# EAGLE board RPM3 (EAGLE 7.6.0)
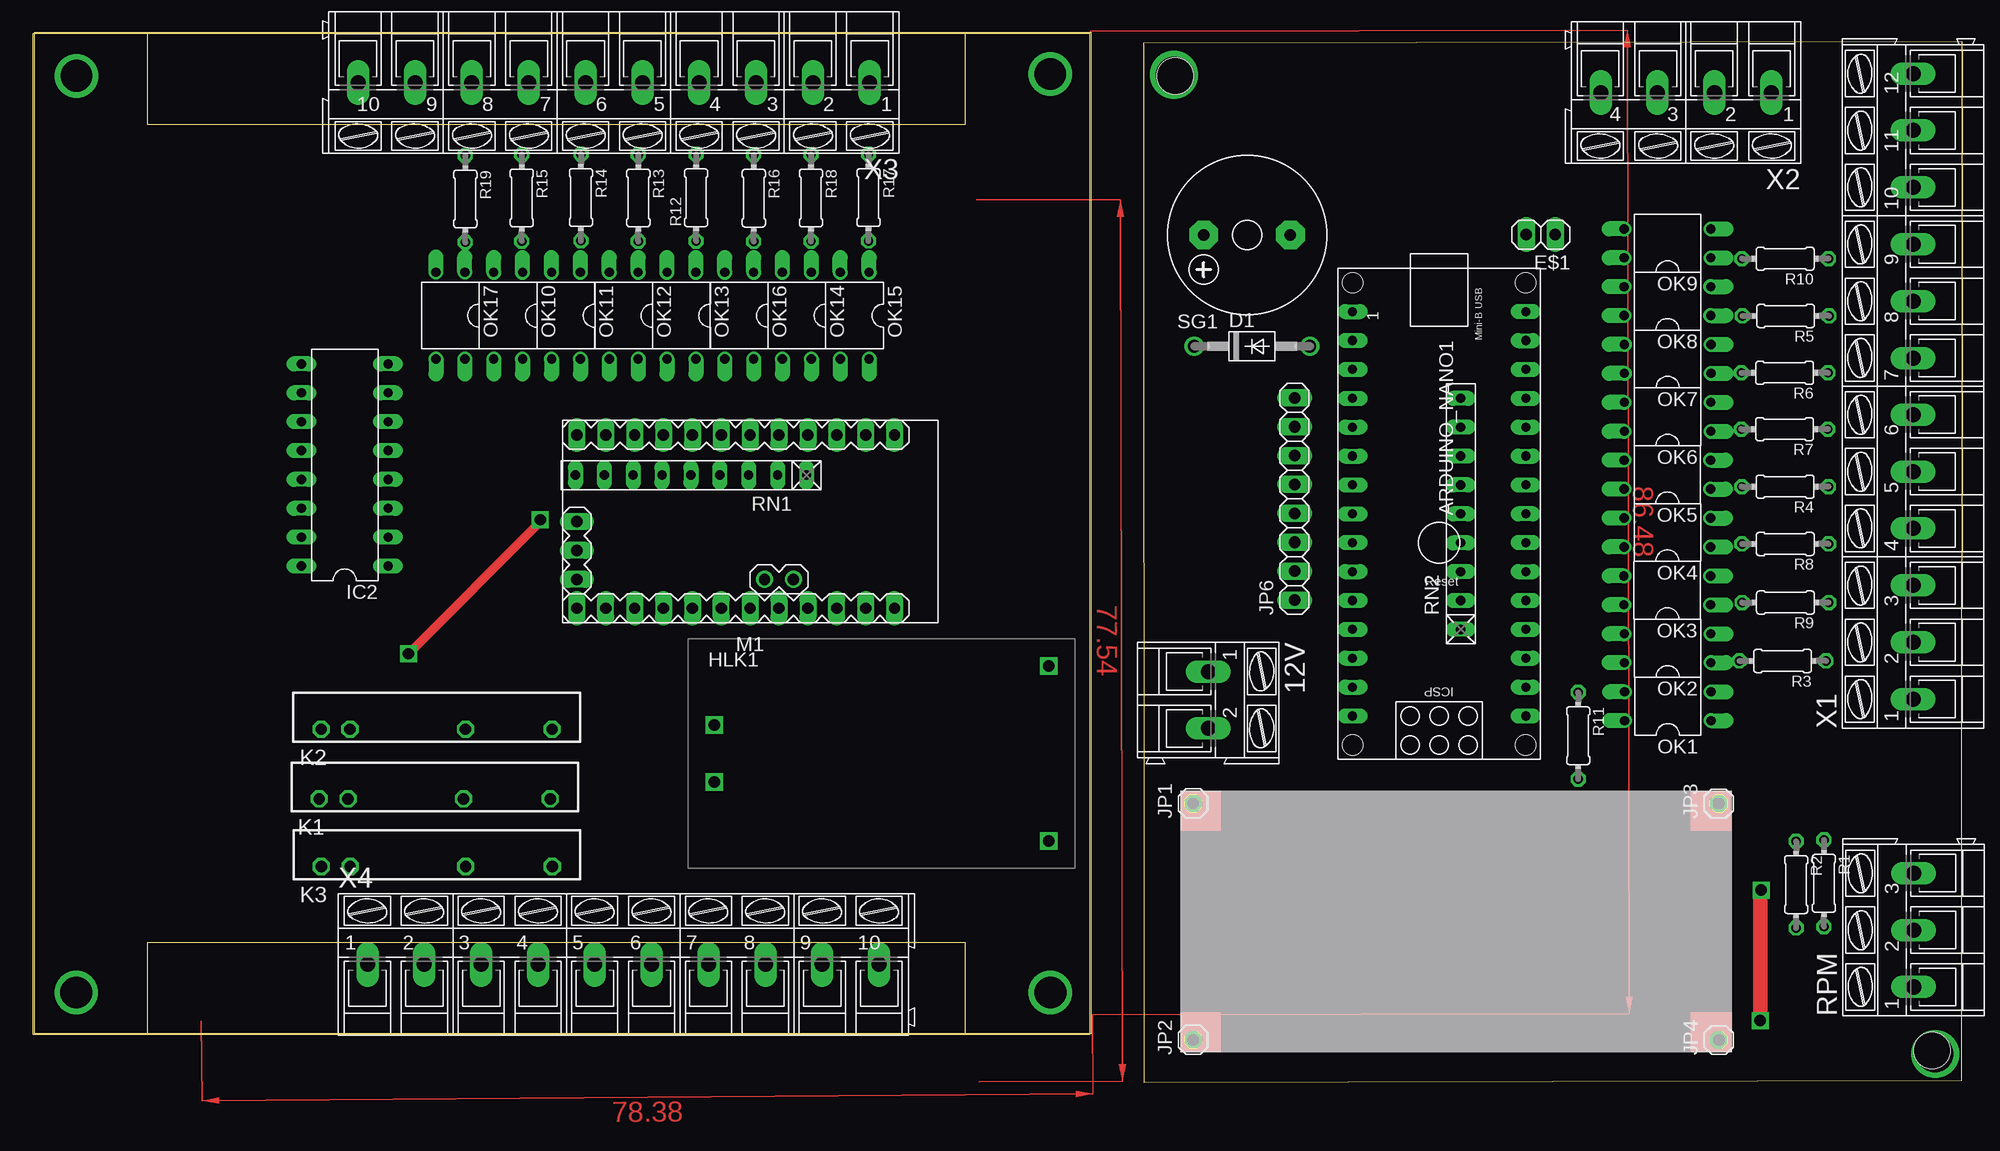
[diagram p0: board, top side]
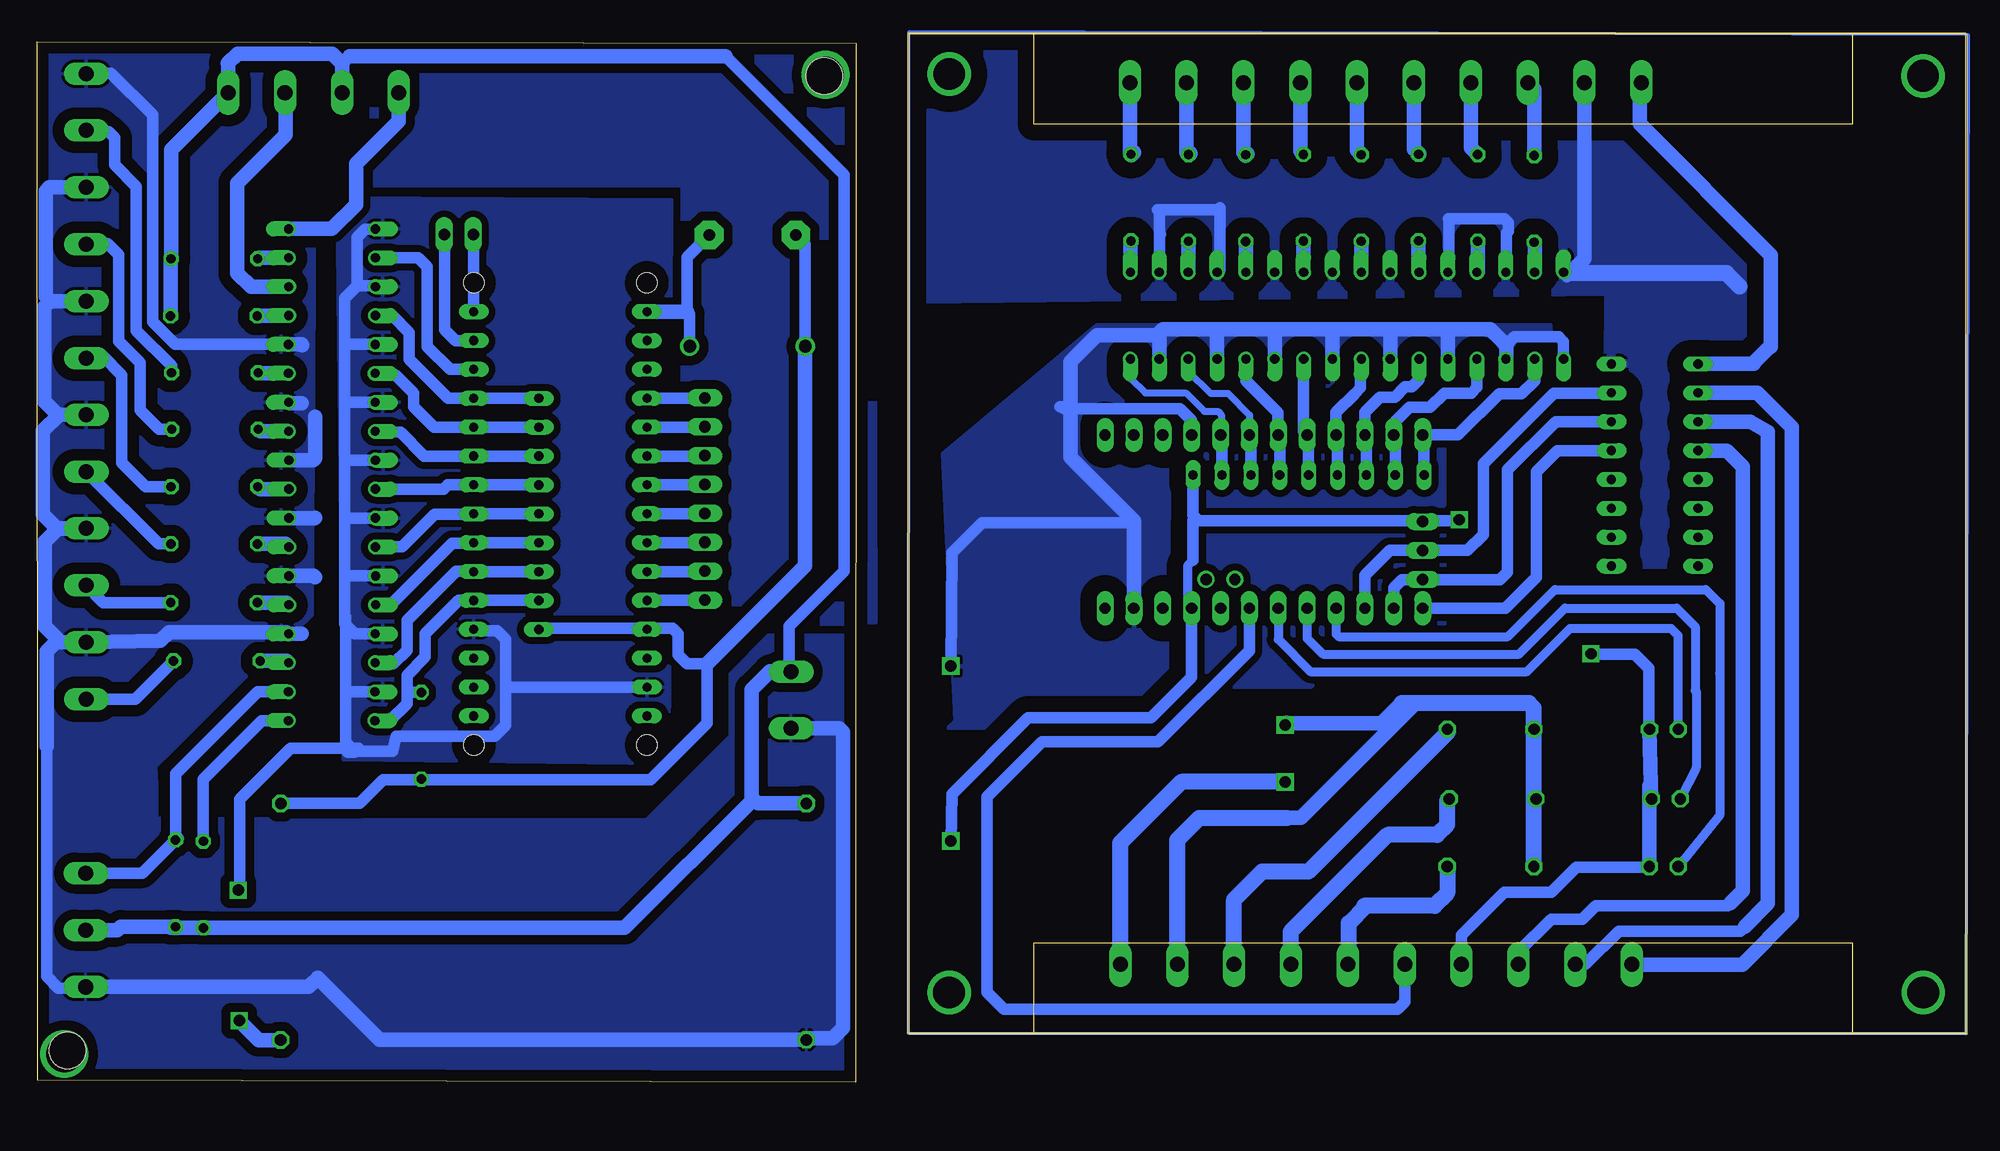
[diagram p1: board, bottom side, seen from below]

Size 169.71 x 92.29 mm. Coordinates in mm from the lower left corner, seen from the top.
Outline: 169.69,0.17 169.71,91.51 97.69,91.34 97.74,0 169.69,0.17
Outline: 93,92.21 0,92.21 0,4.21 93,4.21 93,92.21
Outline: 0.14,4.29 93.14,4.29 93.14,92.29 0.14,92.29 0.14,4.29
Copper layers (1*16): Top 0.035mm / dielectric 1.5mm / Bottom 0.035mm
Design rules "default": minimum track width 10mil, minimum drill 24mil, track to track 8mil, track to pad 8mil, pad to pad 8mil, via to via 8mil, smd to smd 8mil, copper to edge 40mil, drill to drill 8mil, minimum pad ring 10mil, minimum via ring 8mil, stop-mask expansion 4mil, vias tented up to drill 0mil, thermal gap 10mil
Holes 3.2 mm at 100.49,88.49 167.05,2.79

## Footprints (pad centres in the part's own frame; a part is rotated, then mirrored left to right if it is on the bottom)
AK300/2 = drill 1.321 long: 1 -2.515,0; 2 2.489,0
ARDUINO_NANO = drill 0.8 long: 1 -20.32,-7.62; 2 -17.78,-7.62; 3 -15.24,-7.62; 4 -12.7,-7.62; 5 -10.16,-7.62; 6 -7.62,-7.62; 7 -5.08,-7.62; 8 -2.54,-7.62; 9 0,-7.62; 10 2.54,-7.62; 11 5.08,-7.62; 12 7.62,-7.62; 13 10.16,-7.62; 14 12.7,-7.62; 15 15.24,-7.62; 16 15.24,7.62; 17 12.7,7.62; 18 10.16,7.62; 19 7.62,7.62; 20 5.08,7.62; 21 2.54,7.62; 22 0,7.62; 23 -2.54,7.62; 24 -5.08,7.62; 25 -7.62,7.62; 26 -10.16,7.62; 27 -12.7,7.62; 28 -15.24,7.62; 29 -17.78,7.62; 30 -20.32,7.62 | hole 1.778: -22.86,-7.62; -22.86,7.62; 17.78,7.62; 17.78,-7.62
DO41-10 = drill 1.118: A 5.08,0; C -5.08,0
1X02 = drill 1.016 long: 1 -1.27,0; 2 1.27,0
HLK-PM01 = drill 1.016 square: P$1 -14.7,2.5; P$2 -14.7,-2.5; P$3 14.7,7.7; P$4 14.7,-7.7
DIL16 = drill 0.813 long: 1 -8.89,-3.81; 2 -6.35,-3.81; 3 -3.81,-3.81; 4 -1.27,-3.81; 5 1.27,-3.81; 6 3.81,-3.81; 7 6.35,-3.81; 8 8.89,-3.81; 9 8.89,3.81; 10 6.35,3.81; 11 3.81,3.81; 12 1.27,3.81; 13 -1.27,3.81; 14 -3.81,3.81; 15 -6.35,3.81; 16 -8.89,3.81
1X01 = drill 1.016 octagon: 1 0,0
1X08 = drill 1.016 long: 1 -8.89,0; 2 -6.35,0; 3 -3.81,0; 4 -1.27,0; 5 1.27,0; 6 3.81,0; 7 6.35,0; 8 8.89,0
AQG = drill 1 octagon: + -7.62,0; - -10.16,0; O1 2.54,0; O2 10.16,0
ARDUINO-PRO-MINI = drill 1: J2.1 -1.27,5.08; J2.2 -3.81,5.08 | drill 1 long: J3.1 15.24,0; J3.2 15.24,2.54; J3.3 15.24,5.08; J6.1 -12.7,7.62; J6.2 -10.16,7.62; J6.3 -7.62,7.62; J6.4 -5.08,7.62; J6.5 -2.54,7.62; J6.6 0,7.62; J6.7 2.54,7.62; J6.8 5.08,7.62; J6.9 7.62,7.62; J6.10 10.16,7.62; J6.11 12.7,7.62; J6.12 15.24,7.62; J7.1 15.24,-7.62; J7.2 12.7,-7.62; J7.3 10.16,-7.62; J7.4 7.62,-7.62; J7.5 5.08,-7.62; J7.6 2.54,-7.62; J7.7 0,-7.62; J7.8 -2.54,-7.62; J7.9 -5.08,-7.62; J7.10 -7.62,-7.62; J7.11 -10.16,-7.62; J7.12 -12.7,-7.62
DIL04 = drill 0.813 offset: 1 -1.27,-3.81; 2 1.27,-3.81; 3 1.27,3.81; 4 -1.27,3.81
0204/7 = drill 0.813 octagon: 1 -3.81,0; 2 3.81,0
RN-9 = drill 0.813 long: 1 -10.16,0; 2 -7.62,0; 3 -5.08,0; 4 -2.54,0; 5 0,0; 6 2.54,0; 7 5.08,0; 8 7.62,0; 9 10.16,0
AK300/3 = drill 1.321 long: 1 -5.004,0; 2 0,0; 3 5.004,0
F/CM12P = drill 1.016 pad 2.54 octagon: + 3.81,0; - -3.81,0
AK300/12 = drill 1.321 long: 1 -27.508,0; 2 -22.504,0; 3 -17.501,0; 4 -12.497,0; 5 -7.493,0; 6 -2.489,0; 7 2.489,0; 8 7.493,0; 9 12.497,0; 10 17.501,0; 11 22.504,0; 12 27.508,0
AK300/4 = drill 1.321 long: 1 -7.493,0; 2 -2.515,0; 3 2.515,0; 4 7.493,0
AK300/10 = drill 1.321 long: 1 -22.504,0; 2 -17.501,0; 3 -12.497,0; 4 -7.493,0; 5 -2.515,0; 6 2.489,0; 7 7.493,0; 8 12.497,0; 9 17.501,0; 10 22.504,0

## Placement (x,y rotation side)
12V  [AK300/2]  103.39,33.6 270 top
ARDUINO_NANO1  [ARDUINO_NANO]  123.7,47.44 270 top
D1  1N4004  [DO41-10]  107.24,64.72 0 top
E$1  [1X02]  132.64,74.53 180 top
HLK1  HLK-PM013W  [HLK-PM01]  74.65,28.9 0 top
IC2  ULN2003AN  [DIL16]  27.43,54.28 90 top
JP1  [1X01]  102.06,24.52 90 top
JP2  [1X01]  102.06,3.73 90 top
JP3  [1X01]  148.29,24.51 90 top
JP4  [1X01]  148.3,3.71 90 top
JP6  [1X08]  110.98,51.29 90 top
K1  AQG12105  [AQG]  35.35,24.91 0 top
K2  AQG12105  [AQG]  35.52,31.03 0 top
K3  AQG12105  [AQG]  35.53,18.96 0 top
M1  ARDUINO-PRO-MINI-5.0V  [ARDUINO-PRO-MINI]  63.09,49.3 180 top
OK1  PC817  [DIL04]  143.82,33.06 90 top
OK2  PC817  [DIL04]  143.8,38.16 90 top
OK3  PC817  [DIL04]  143.77,43.25 90 top
OK4  PC817  [DIL04]  143.78,48.34 90 top
OK5  PC817  [DIL04]  143.78,53.43 90 top
OK6  PC817  [DIL04]  143.79,58.51 90 top
OK7  PC817  [DIL04]  143.8,63.6 90 top
OK8  PC817  [DIL04]  143.79,68.68 90 top
OK9  PC817  [DIL04]  143.79,73.77 90 top
OK10  PC817  [DIL04]  41.81,67.41 180 top
OK11  PC817  [DIL04]  46.89,67.41 180 top
OK12  PC817  [DIL04]  51.98,67.41 180 top
OK13  PC817  [DIL04]  57.05,67.41 180 top
OK14  PC817  [DIL04]  67.21,67.41 180 top
OK15  PC817  [DIL04]  72.29,67.41 180 top
OK16  PC817  [DIL04]  62.13,67.41 180 top
OK17  PC817  [DIL04]  36.73,67.42 180 top
R1  [0204/7]  157.55,17.49 270 top
R2  [0204/7]  155.1,17.37 270 top
R3  [0204/7]  153.92,37.04 180 top
R4  [0204/7]  154.13,52.37 180 top
R5  [0204/7]  154.18,67.38 180 top
R6  [0204/7]  154.09,62.38 180 top
R7  [0204/7]  154.09,57.43 180 top
R8  [0204/7]  154.15,47.33 180 top
R9  [0204/7]  154.16,42.18 180 top
R10  [0204/7]  154.14,72.42 180 top
R11  [0204/7]  135.93,30.47 270 top
R12  [0204/7]  58.34,77.78 90 top
R13  [0204/7]  53.26,77.76 270 top
R14  [0204/7]  48.21,77.8 270 top
R15  [0204/7]  43.01,77.76 270 top
R16  [0204/7]  63.42,77.74 270 top
R17  [0204/7]  73.51,77.79 270 top
R18  [0204/7]  68.45,77.76 270 top
R19  [0204/7]  38.04,77.67 270 top
RN1  [RN-9]  57.89,53.39 180 top
RN2  [RN-9]  125.6,49.98 90 top
RPM  [AK300/3]  165.44,13.38 90 top
SG1  F/CM12P  [F/CM12P]  106.8,74.5 180 top
X1  [AK300/12]  165.4,61.19 90 top
X2  [AK300/4]  145.41,87.02 180 top
X3  [AK300/10]  51.11,87.9 180 top
X4  [AK300/10]  51.94,10.36 0 top

## Library data of the parts
12V RPM X1-X4 = con-ptr500; OC_FARNELL: unknown; OC_NEWARK: unknown
ARDUINO_NANO1 = ArduinoNanoV30
D1 = diode
E$1 JP1-JP4 JP6 = pinhead
HLK1 = HLK-PM01
IC2 = uln-udn
K1-K3 = relay; MF: AROMAT/ MATSUSHITA; MPN: AQG12105; OC_FARNELL: unknown; OC_NEWARK: 20J4759
M1 = diy-modules
OK1-OK17 = optocoupler; MPN: PC817X4J000F; OC_FARNELL: 9707727; OC_NEWARK: 97K7059
R1 R5 R10 R12-R19 = rcl
R2-R4 R6-R9 R11 = resistor
RN1 RN2 = resistor-net; OC_FARNELL: unknown; OC_NEWARK: unknown
SG1 = buzzer; OC_FARNELL: unknown; OC_NEWARK: unknown

## Nets
5V: HLK1.P$4 K1.+ K2.+ K3.+ M1.J6.4 RN1.1 X4.4
12V: IC2.9 X3.10
GND: ARDUINO_NANO1.14 ARDUINO_NANO1.19 JP4.1 OK1.3 OK2.3 OK3.3 OK4.3 OK5.3 OK6.3 OK7.3 OK8.3 OK9.3
GND1: HLK1.P$3 M1.J6.2 M1.J7.9 OK10.3 OK11.3 OK12.3 OK13.3 OK14.3 OK15.3 OK16.3 OK17.3
GND12V: IC2.8 OK10.2 OK11.2 OK12.2 OK13.2 OK14.2 OK15.2 OK16.2 OK17.2 X3.9
N$1: ARDUINO_NANO1.20 OK1.4 R11.1 RN2.2
N$2: OK1.1 R2.1
N$3: M1.J7.5 OK13.4 RN1.5
N$4: M1.J7.6 OK16.4 RN1.4
N$5: OK2.1 R3.2
N$6: OK3.1 R9.2
N$7: OK4.1 R8.2
N$8: OK5.1 R4.2
N$9: OK6.1 R7.2
N$10: OK7.1 R6.2
N$11: R7.1 X1.9
N$12: ARDUINO_NANO1.29 E$1.1
N$13: R4.1 X1.7
N$14: R17.1 X3.1
N$15: R3.1 X1.1
N$16: R9.1 X1.3
N$17: ARDUINO_NANO1.30 E$1.2
N$18: ARDUINO_NANO1.11 JP6.1
N$19: R18.1 X3.2
N$20: R15.1 X3.7
N$21: R8.1 X1.5
N$22: ARDUINO_NANO1.10 JP6.2
N$23: ARDUINO_NANO1.21 OK2.4 RN2.3
N$24: ARDUINO_NANO1.22 OK3.4 RN2.4
N$25: ARDUINO_NANO1.23 OK4.4 RN2.5
N$26: ARDUINO_NANO1.24 OK5.4 RN2.6
N$27: ARDUINO_NANO1.25 OK6.4 RN2.7
N$28: ARDUINO_NANO1.26 OK7.4 RN2.8
N$29: ARDUINO_NANO1.9 JP6.3
N$30: ARDUINO_NANO1.27 OK8.4 RN2.9
N$31: ARDUINO_NANO1.1 D1.A SG1.-
N$32: ARDUINO_NANO1.8 JP6.4
N$33: ARDUINO_NANO1.7 JP6.5
N$34: ARDUINO_NANO1.6 JP6.6
N$35: ARDUINO_NANO1.5 JP6.7
N$36: ARDUINO_NANO1.4 JP6.8
N$37: R13.1 X3.5
N$38: OK9.1 R10.2
N$39: OK8.1 R5.2
N$40: R6.1 X1.11
N$41: 12V.2 JP2.1 OK2.2 OK3.2 OK4.2 OK5.2 OK6.2 OK7.2 RPM.1 X1.2 X1.4 X1.6 X1.8 X1.10 X1.12
N$42: 12V.1 JP1.1 R1.2 R2.2 R5.1 R10.1 RPM.2 X2.1 X2.3
N$43: OK8.2 X2.2
N$44: R14.1 X3.6
N$45: OK9.2 X2.4
N$46: M1.J7.3 OK11.4 RN1.7
N$47: M1.J7.7 OK14.4 RN1.3
N$48: M1.J7.2 OK10.4 RN1.8
N$49: IC2.5 M1.J6.12
N$50: OK13.1 R12.1
N$51: R16.1 X3.3
N$52: IC2.7 M1.J6.10
N$53: M1.J7.8 OK15.4 RN1.2
N$54: IC2.6 M1.J6.11
N$55: M1.J7.4 OK12.4 RN1.6
N$56: OK10.1 R15.2
N$57: OK11.1 R14.2
N$58: OK12.1 R13.2
N$59: R12.2 X3.4
N$60: OK16.1 R16.2
N$61: OK14.1 R18.2
N$62: OK15.1 R17.2
N$63: IC2.10 X4.1
N$64: IC2.11 X4.2
N$65: IC2.12 X4.3
N$66: HLK1.P$2 X4.10
N$67: HLK1.P$1 K1.O1 K2.O1 K3.O1 X4.9
N$68: OK17.1 R19.2
N$69: R19.1 X3.8
N$70: K3.O2 X4.6
N$71: K1.O2 X4.7
N$72: K2.O2 X4.8
N$73: M1.J7.1 OK17.4 RN1.9
N$74: M1.J6.6 X4.5
N$75: K3.- M1.J6.9
N$76: K1.- M1.J6.8
N$77: K2.- M1.J6.7
RAW: M1.J6.1
S$1: ARDUINO_NANO1.28 OK9.4
SIGNAL: OK1.2 R1.1 RPM.3
VCC: ARDUINO_NANO1.12 D1.C JP3.1 R11.2 RN2.1 SG1.+
VIN: ARDUINO_NANO1.15

## Tracks (layer width: path | path; a pad name or v marks a point on that pad's centre or on a via)
5V  (via drill 1)
  Top 0.813: v44.63,49.45 44.63,49.27 v33.04,37.68
  Top 1.016: v44.63,49.45 44.77,49.45
  Bottom 0.61: 68.53,42.04 M1.J6.4
  Bottom 0.813: 68.05,45.88 68.53,45.4 68.53,42.04 | v33.04,37.68 32.93,37.68 32.88,37.63
  Bottom 1.016: HLK1.P$4 89.26,25.34 82.56,32.04 71.77,32.04 68.21,35.6 68.21,41.64 M1.J6.4 | RN1.1 68.05,49.86 67.82,49.63 | 67.82,49.63 67.58,49.39 44.7,49.39 v44.63,49.45 | 32.88,37.63 29.2,37.63 27.97,36.4 27.97,31.11 K2.+ | 68.05,45.88 68.05,49.4 67.82,49.63 | X4.4 44.44,12.91 40.67,16.68 36.55,16.68 34.32,18.91 27.97,18.91 K3.+
  Bottom 1.27: K3.+ 27.91,26.08 K1.+ 27.8,26.19 K2.+
12V
  Bottom 1.27: IC2.9 18.83,63.17 | 18.83,63.17 18.74,63.17 | 18.83,63.17 17.31,64.68 17.22,64.68 17.22,72.74 28.74,84.26 28.74,87.77 X3.10
GND  (via drill 1)
  Top 1.27: v151.94,5.41 151.94,16.82 v152.02,16.9
  Bottom 1.016: 128.5,34.93 128.5,31.41 129.48,30.42 138.16,30.42 138.44,29.11 141.23,29.11 | ARDUINO_NANO1.19 131.22,39.72 129.28,39.72 128.5,38.94 128.5,34.93 | ARDUINO_NANO1.14 128.31,34.74 128.5,34.93 | OK2.3 141.81,39.43 142.68,40.3 142.68,41 | 142.68,41 142.68,44.69 | 142.68,44.69 142.68,49.65 | 142.68,49.65 142.68,54.84 | 142.68,54.84 142.68,59.75 | 142.68,59.75 142.68,65.17 | 142.68,65.17 142.68,68.92 141.58,70.02 | OK8.3 140.05,70.02 141.58,70.02 | OK7.3 142.39,64.87 142.68,65.17 | OK6.3 142.65,59.78 142.68,59.75 | OK5.3 142.53,54.7 142.68,54.84 | OK4.3 142.64,49.61 142.68,49.65 | OK3.3 142.52,44.52 142.68,44.69 | 142.6,34.34 142.6,29.87 141.86,29.14 | 142.6,34.34 142.6,40.91 142.68,41 | 141.23,29.11 142.33,29.11 142.36,29.14 | OK1.3 142.59,34.33 142.6,34.34 | OK9.3 139.98,75.01 140.86,75.01 141.56,74.3 141.56,70.04 141.58,70.02 | 151.89,16.88 151.89,24.88 147.43,29.34 141.46,29.34 141.23,29.11
  Bottom 1.27: JP4.1 150.24,3.71 v151.94,5.41 | v152.02,16.9 151.91,16.9 151.89,16.88 | 142.36,29.14 141.86,29.14
  pour Bottom (isolate 0.61): 143.32,77.79 142.81,28.37 114.14,28.02 113.94,77.62
GND1
  Bottom 0.61: 78.63,59.3 78.82,59.1
  Bottom 1.016: HLK1.P$3 89.26,46.56 86.63,49.19 73.66,49.19 73.25,48.78 | OK17.3 35.46,65.12 35.89,65.55 39.77,65.55 40.5,64.82 | M1.J7.9 68.17,58.2 69.19,59.22 79.39,59.22 79.56,59.38 | 79.56,59.38 79.74,59.38 | 79.56,59.38 78.87,59.38 78.82,59.43
  Bottom 1.27: OK15.3 71.02,65.9 | 71.02,65.9 70.71,66.21 66.15,66.21 | 66.15,66.21 60.96,66.21 | 60.96,66.21 55.69,66.21 | 55.69,66.21 50.7,66.21 | 50.7,66.21 45.59,66.21 | 45.59,66.21 41.88,66.21 40.5,64.82 40.5,63.64 OK10.3 | OK11.3 45.62,66.18 45.59,66.21 | OK12.3 50.71,66.2 50.7,66.21 | OK13.3 55.78,66.12 55.69,66.21 | OK16.3 60.86,66.11 60.96,66.21 | OK14.3 65.94,65.99 66.15,66.21 | M1.J6.2 73.25,48.78 73.25,49.37 78.82,54.94 78.82,59.1 78.82,59.43 78.82,63.37 76.5,65.7 71.22,65.7 71.02,65.9
  pour Bottom (isolate 1.422): 89.54,31.16 67.42,31.16 51.03,39.49 36.7,39.45 36.26,59.64 36.64,66.58 76.51,66.58 90.04,55.25 88.95,31.75
GND12V
  Bottom 0.813: 45.6,71.93 45.54,71.87
  Bottom 1.016: 70.91,74.58 71.02,74.47 OK15.2 71.02,76.6 71.16,76.74 65.88,76.74 65.7,76.92 65.7,71.45 OK14.2 | OK10.2 40.47,71.14 40.47,74.65 40.29,74.83 40.29,75.56 40.66,75.93 45.59,75.93 45.54,75.88 45.54,71.87 45.54,71.3 OK11.2 | 35.19,70.83 34.88,71.14
  Bottom 1.27: X3.9 33.61,72.41 34.88,71.14
  Bottom 1.422: 19.96,69.97 21.14,71.14 34.88,71.14
  pour Bottom (isolate 1.422): 92.38,68.8 92.84,91.03 33.22,91.73 16.08,91.73 16.39,90.54 16.29,73.83 15.68,71.71 0.23,69.18 0.64,41.91 31.65,42.35 31.47,69.52
N$1
  Bottom 1.016: 138.88,31.79 OK1.4 139.87,31.93 138.65,31.82 137.19,33.29 137.19,34.23 | RN2.2 ARDUINO_NANO1.20 132.64,42.36 135.58,39.43 135.58,37.41 137.19,35.8 137.19,34.23 | R11.1 137.13,34.28 137.19,34.23
N$2  (1 unrouted)
  Bottom 1.016: R2.1 155.1,26.65 149.98,31.77 147.65,31.77
N$3
  Bottom 1.016: OK13.4 58.32,57.23 M1.J7.5 57.89,56.8 RN1.5
N$4
  Bottom 1.016: RN1.4 60.43,56.8 M1.J7.6 60.59,56.96 60.59,58.86 63.4,61.68 OK16.4
N$5
  Bottom 1.27: R3.2 147.76,37.04 OK2.1
N$6
  Bottom 1.27: R9.2 147.77,42.18 OK3.1
N$7
  Bottom 1.27: R8.2 147.85,47.33 OK4.1
N$8
  Bottom 1.27: OK5.1 150.11,52.16 R4.2
N$9
  Bottom 1.27: OK6.1 150.09,57.24 R7.2
N$10
  Bottom 1.27: OK7.1 150.24,62.33 R6.2
N$11
  Bottom 1.016: X1.9 165.34,73.75 163.53,73.75 162.55,72.77 162.55,65.18 160.66,63.28 160.66,59.11 158.98,57.43 R7.1
N$12
  Bottom 1.016: ARDUINO_NANO1.29 132.92,65.22 133.88,66.19 133.88,74.5 E$1.1
N$13
  Bottom 1.016: X1.7 165.26,63.82 163.91,63.82 162.27,62.17 162.27,54.46 160.18,52.37 R4.1
N$14
  Bottom 1.27: 73.56,81.66 R17.1 73.62,81.71 X3.1
  Bottom 1.422: 73.33,81.78 R17.1
N$15
  Bottom 1.016: X1.1 161.08,33.68 R3.1
N$16
  Bottom 1.016: R9.1 163.89,42.18 X1.3
N$17
  Bottom 1.016: ARDUINO_NANO1.30 131.32,74.48 E$1.2
N$18
  Bottom 1.016: ARDUINO_NANO1.11 111.02,42.36 JP6.1
N$19
  Bottom 1.27: X3.2 68.61,81.73 R18.1
  Bottom 1.422: 68.33,81.69 R18.1
N$20
  Bottom 1.27: X3.7 43.62,82.19 R15.1
N$21
  Bottom 1.016: R8.1 159.04,47.33 X1.5
N$22
  Bottom 1.016: ARDUINO_NANO1.10 111.02,44.9 JP6.2
N$23
  Bottom 1.016: 131.28,44.86 ARDUINO_NANO1.21 130.77,44.9 | RN2.3 130.77,44.9 | OK2.4 138.41,36.78 137.19,38.01 137.19,40.62 132.88,44.92 130.8,44.92 130.77,44.9
N$24
  Bottom 1.016: 131.28,47.4 ARDUINO_NANO1.22 | RN2.4 ARDUINO_NANO1.22 | OK3.4 138.64,41.98 133.23,47.39 131.38,47.39 ARDUINO_NANO1.22
N$25
  Bottom 1.016: 131.28,49.94 ARDUINO_NANO1.23 | ARDUINO_NANO1.23 131.36,49.95 134.75,49.95 137.63,47.07 OK4.4 | RN2.5 ARDUINO_NANO1.23
N$26
  Bottom 1.016: RN2.6 ARDUINO_NANO1.24 131.33,52.54 133.6,52.54 133.98,52.16 OK5.4
N$27
  Bottom 1.016: 131.28,55.02 ARDUINO_NANO1.25 | ARDUINO_NANO1.25 135.69,55.06 137.76,57.14 139.97,57.25 OK6.4 | RN2.7 ARDUINO_NANO1.25
N$28
  Bottom 1.016: 131.28,57.56 ARDUINO_NANO1.26 | ARDUINO_NANO1.26 134.79,57.6 136.6,59.41 136.6,60.6 138.22,62.22 OK7.4 | RN2.8 ARDUINO_NANO1.26
N$29
  Bottom 1.016: ARDUINO_NANO1.9 111.02,47.44 JP6.3
N$30
  Bottom 1.016: 131.28,60.1 ARDUINO_NANO1.27 | OK8.4 139.95,67.38 138.46,67.38 136.99,65.91 136.99,63.56 133.57,60.14 ARDUINO_NANO1.27 | RN2.9 ARDUINO_NANO1.27
N$31
  Bottom 1.016: D1.A 112.32,67.51 112.57,67.76 112.57,72.55 SG1.-
  Bottom 1.27: ARDUINO_NANO1.1 112.57,67.76
N$32
  Bottom 1.016: ARDUINO_NANO1.8 111.02,49.98 JP6.4
N$33
  Bottom 1.016: ARDUINO_NANO1.7 111.02,52.52 JP6.5
N$34
  Bottom 1.016: ARDUINO_NANO1.6 111.02,55.06 JP6.6
N$35
  Bottom 1.016: ARDUINO_NANO1.5 111.02,57.6 JP6.7
N$36
  Bottom 1.016: ARDUINO_NANO1.4 111.02,60.14 JP6.8
N$37
  Bottom 1.27: 53.55,81.86 R13.1 53.63,81.93 X3.5
  Bottom 1.422: 53.32,81.62 R13.1
N$38
  Bottom 1.27: OK9.1 150.25,72.5 R10.2
N$39
  Bottom 1.27: OK8.1 150.34,67.41 R5.2
N$40
  Bottom 1.016: R6.1 157.9,63 161,66.09 161,78.77 162.9,80.67 162.9,83.05 163.44,83.59 165.3,83.59 X1.11
N$41
  Bottom 1.016: OK7.2 157.59,64.87 159.58,66.86 159.58,85.06 163.25,88.73 165.37,88.73 X1.12 | 145.46,8.77 145.05,9.18 | 168.89,29.56 168.89,9.3 167.85,8.25 165.56,8.25 RPM.1
  Bottom 1.27: 12V.2 99.18,31.11 98.82,30.76 98.82,4.78 99.74,3.86 101.93,3.86 JP2.1 139.6,3.73 145.05,9.18 | RPM.1 145.86,8.37 145.46,8.77 | 146.44,39.43 OK2.2 147.77,39.59 158.13,39.59 158.92,38.8 X1.2 | 145.29,58.53 145.29,54.85 145.45,54.7 OK5.2 | 146.47,59.71 147.52,59.71 OK6.2 | OK3.2 145.39,44.52 145.29,44.42 | OK4.2 145.31,49.61 145.29,49.63 | X1.2 168.11,38.69 168.89,37.9 168.89,29.56 | X1.2 167.65,38.69 169.06,40.1 169.06,47.51 167.9,48.66 165.44,48.66 X1.4 167.99,48.69 169.22,49.92 169.22,57.28 167.79,58.71 X1.6 167.9,58.7 169.09,59.9 169.09,68.13 168.53,68.68 | X1.8 168.53,68.68 | X1.10 168.64,78.69 168.98,78.35 168.98,69.13 168.53,68.68 | OK7.2 146.48,64.87 146.42,64.82
  pour Bottom (isolate 0.813): 97.77,39.28 105.47,39.28 108.77,35.98 108.77,30.51 116.22,23.06 138.68,23.06 143.3,23.11 169.64,23.33 169.91,9.6 169.84,7.89 169.6,0.15 97.5,0.1 97.74,2.33 97.74,39.35
  pour Bottom (isolate 1.016): 145.21,91.25 145.51,41.08 159.28,27.72 159.02,23.07 169.46,22.88 169.01,91.22
N$42
  Bottom 1.016: 157.99,72.38 R10.1 | 152.91,89.56 152.94,89.6 | 101.82,24.28 JP1.1 | 12V.1 103.57,36.29 103.57,40.11 98.73,44.95 98.73,79.78 109.15,90.2 | 142.9,89.57 142.85,89.57 142.21,90.2
  Bottom 1.27: 152.94,89.6 152.09,90.45 143.78,90.45 142.9,89.57 X2.3 | R5.1 157.99,72.38 | R10.1 157.95,81.98 X2.1 152.91,89.56 | 12V.1 103.43,36.14 105.28,36.14 106.9,34.51 106.9,25.1 106.71,24.9 | JP1.1 106.32,24.52 106.71,24.9 | 106.71,24.9 118.05,13.56 R2.2 158,13.56 158.11,13.68 | 157.44,13.56 R1.2 158.11,13.68 | 158.11,13.68 162.37,13.68 162.67,13.38 RPM.2 | 142.21,90.2 109.15,90.2
N$43
  Bottom 1.016: 147.84,86.94 X2.2
  Bottom 1.27: OK8.2 150.91,69.95 152.11,71.16 152.11,79.05 147.84,83.31 147.84,86.94
N$44
  Bottom 1.27: X3.6 48.62,82.02 R14.1
  Bottom 1.422: 48.31,81.71 R14.1
N$45
  Bottom 1.27: X2.4 137.94,87.01 137.94,84.5 141.68,80.75 141.68,77.16 143.81,75.03 OK9.2
N$46
  Bottom 1.016: RN1.7 52.81,56.8 M1.J7.3 52.93,58.93 51.61,60.25 50.29,60.25 49.4,61.14 48.79,61.14 48.17,61.77 OK11.4
N$47
  Bottom 0.61: OK14.4 68.48,62.54 66.5,60.57 64.97,60.57 63.07,58.67 63.07,56.95 M1.J7.7
  Bottom 1.016: RN1.3 62.97,56.8 M1.J7.7
N$48
  Bottom 1.016: RN1.8 50.27,56.8 M1.J7.2 50.29,57.02 50.29,58.1 49.04,59.35 47.2,59.35 45.95,60.61 43.58,60.61 43.08,61.1 OK10.4
N$49
  Bottom 1.016: M1.J6.12 40.56,41.68 37.84,44.4 37.84,53.69 35.99,55.54 IC2.5
N$50
  Bottom 1.27: R12.1 58.34,71.24 OK13.1
N$51
  Bottom 1.27: 63.56,81.69 R16.1 63.61,81.75 X3.3
  Bottom 1.422: 63.33,81.64 R16.1
N$52
  Bottom 1.016: M1.J6.10 52.93,44.58 50.72,46.79 43.9,46.79 42.53,48.15 42.53,54.39 36.33,60.59 31.28,60.59 IC2.7
N$53
  Bottom 0.61: OK15.4 73.56,61.92 72.25,60.61 68.69,60.61 67.06,58.98 65.83,58.98 65.56,58.71 65.56,57 M1.J7.8
  Bottom 1.016: RN1.2 65.51,56.8 M1.J7.8
N$54
  Bottom 1.016: M1.J6.11 50.39,43.5 49.68,44.21 41.05,44.21 40.4,44.86 40.4,53.84 36.15,58.09 IC2.6
N$55
  Bottom 1.016: RN1.6 55.35,56.8 M1.J7.4 55.47,58.92 53.83,60.56 53.34,61.05 53.34,63.51 OK12.4
N$56
  Bottom 1.27: R15.2 43.01,71.29 OK10.1
N$57
  Bottom 1.27: R14.2 48.21,71.27 OK11.1
N$58
  Bottom 1.27: OK12.1 53.25,73.93 R13.2
N$59
  Bottom 1.27: X3.4 58.6,81.85 R12.2
N$60
  Bottom 1.27: OK16.1 63.4,73.92 R16.2
N$61
  Bottom 1.27: R18.2 68.45,71.25 OK14.1
N$62
  Bottom 1.27: OK15.1 73.56,73.93 R17.2
N$63
  Bottom 1.27: IC2.10 18.42,60.63 15.37,57.58 15.37,14.71 19.74,10.34 29.41,10.34 X4.1
N$64
  Bottom 1.016: X4.2 33.54,10.36 30.61,13.29 19.92,13.29 19.53,13.68
  Bottom 1.27: IC2.11 19.03,58.08 17.48,57.2 17.48,15.73 19.53,13.68
N$65
  Bottom 1.016: X4.3 39.44,11.45 36.54,14.35 33.79,14.35 32.62,15.52 21.02,15.52 20.79,15.75
  Bottom 1.27: IC2.12 21.1,55.55 19.69,54.14 19.69,16.85 20.79,15.75
N$66
  Bottom 1.422: HLK1.P$2 69.09,26.4 74.47,21.02 74.47,10.39 X4.10
N$67
  Bottom 1.27: 59.81,23.25 58.56,23.25 48.48,33.34 | 59.8,31.55 51.5,31.55 49.72,33.34
  Bottom 1.422: X4.9 69.44,21.31 67.5,23.25 59.81,23.25 | 59.8,31.55 HLK1.P$1 | K3.O1 38.07,24.73 | 38.07,24.73 K1.O1 | 38.07,24.73 38.07,31.02 | 38.07,31.02 K2.O1 | 38.07,31.02 38.07,32.9 38.51,33.34 48.48,33.34 49.72,33.34
N$68
  Bottom 1.27: OK17.1 38,73.82 R19.2
N$69
  Bottom 1.27: R19.1 38.04,87.33 X3.8
N$70
  Bottom 1.422: X4.6 54.34,10.45 54.34,14 52.84,15.5 | K3.O2 45.69,16.62 46.82,15.5 52.84,15.5 | 52.84,15.5 53.01,15.5
N$71
  Bottom 1.422: X4.7 59.47,10.41 59.47,13.22 50.95,21.74 46.59,21.74 45.68,22.65 45.68,24.73 K1.O2
N$72
  Bottom 0.813: K2.O2 45.68,30.89 45.6,30.82
  Bottom 1.422: X4.8 64.43,16.05 61.98,18.51 57.91,18.51 45.6,30.82
N$73
  Bottom 1.016: RN1.9 47.73,56.8 M1.J7.1 44.74,56.92 41.12,60.54 39.16,60.54 38,61.71 OK17.4
N$74
  Bottom 1.016: X4.5 49.42,7.07 50.06,6.43 84.67,6.43 86.17,7.93 86.17,25.1 81.35,29.92 71.13,29.92 63.09,37.95 M1.J6.6
N$75
  Bottom 0.813: K3.- 21.73,23.45 21.73,35.95 21.71,35.98 21.71,42.08 22.95,43.32 36.22,43.32 40.36,39.18 55.22,39.18 55.47,39.42 M1.J6.9
N$76
  Bottom 0.813: K1.- 23.8,27.65 23.8,34.38 23.88,34.46 23.88,40.07 25.5,41.69 35.33,41.69 39.38,37.64 56.62,37.64 58.01,39.04 M1.J6.8
N$77
  Bottom 0.813: M1.J6.7 60.55,38.93 57.73,36.11 38.67,36.11 34.86,39.91 26.01,39.91 25.39,39.29 25.39,31.06 K2.- 25.37,31.04
N$110  (via drill 2.8 pad 3.81)
  other vias: 89.5,7.88
N$111  (via drill 2.8 pad 3.81)
  other vias: 3.81,7.89
N$112  (via drill 2.8 pad 3.81)
  other vias: 89.49,88.66
N$113  (via drill 2.8 pad 3.81)
  other vias: 3.84,88.49
NS$$
  pour Bottom (isolate 0.61): 67.22,33.2 67.22,57.63 66.65,58.2 45.96,58.14 45.97,56.01 45.97,39.15 46.47,38.72 54.07,38.38 57.69,34.77 65.66,34.77 67.21,33.21
S$1
  Bottom 1.016: ARDUINO_NANO1.28 133.42,62.68 135.42,64.69 135.42,67.16 135.44,67.17 135.44,71.71 136.22,72.5 OK9.4
S$2
  pour Bottom (isolate 0.813): 112.65,40.81 112.65,79.18 139.98,79.12 139.98,92.56 137.35,92.56 137.35,92.24 96.44,92.24 96.27,40.55
S$3
  Bottom 0.254: 93.1,4.27 93.02,92.41 -0.13,92.16 0.07,4.25 93.06,4.26
S$4  (via drill 3.2 pad 3.81)
  other vias: 167.33,2.48
S$5  (via drill 3.2 pad 3.81)
  other vias: 100.38,88.58
SIGNAL
  Bottom 1.016: RPM.3 160.47,18.38 R1.1 157.52,21.33 157.52,27.14 150.34,34.33 OK1.2
  Bottom 1.27: 157.43,21.43 R1.1
VCC
  Bottom 1.016: JP3.1 141.36,24.51 139.29,26.59 135.99,26.59 | 135.99,26.59 115.77,26.59 110.8,31.55 110.8,36.78 112.54,36.78 113.36,37.61 113.36,39.43 113.84,39.91 115.99,39.91 ARDUINO_NANO1.12 | ARDUINO_NANO1.12 116.19,39.93 125.49,39.93 RN2.1 | 116.05,39.85 ARDUINO_NANO1.12 | R11.2 135.93,26.64 135.99,26.59 | D1.C 102.16,73.67 SG1.+
  Bottom 1.27: D1.C 102.18,45.4 110.8,36.78
(copper drawn outside any net)
  shapes: Top area x7